# Altium PCB projet_pcb_nucleo_g431.PCBDOC
Units mil, origin at the board's own origin, x right, y up, seen from the top; angles counter-clockwise.
Board outline 7045 x 2760 mil, 2 copper layers (TopLayer, BottomLayer); 22 components, 35 nets, 107 pads, 0 vias.
Unrouted connection lines stored in the file: 45.
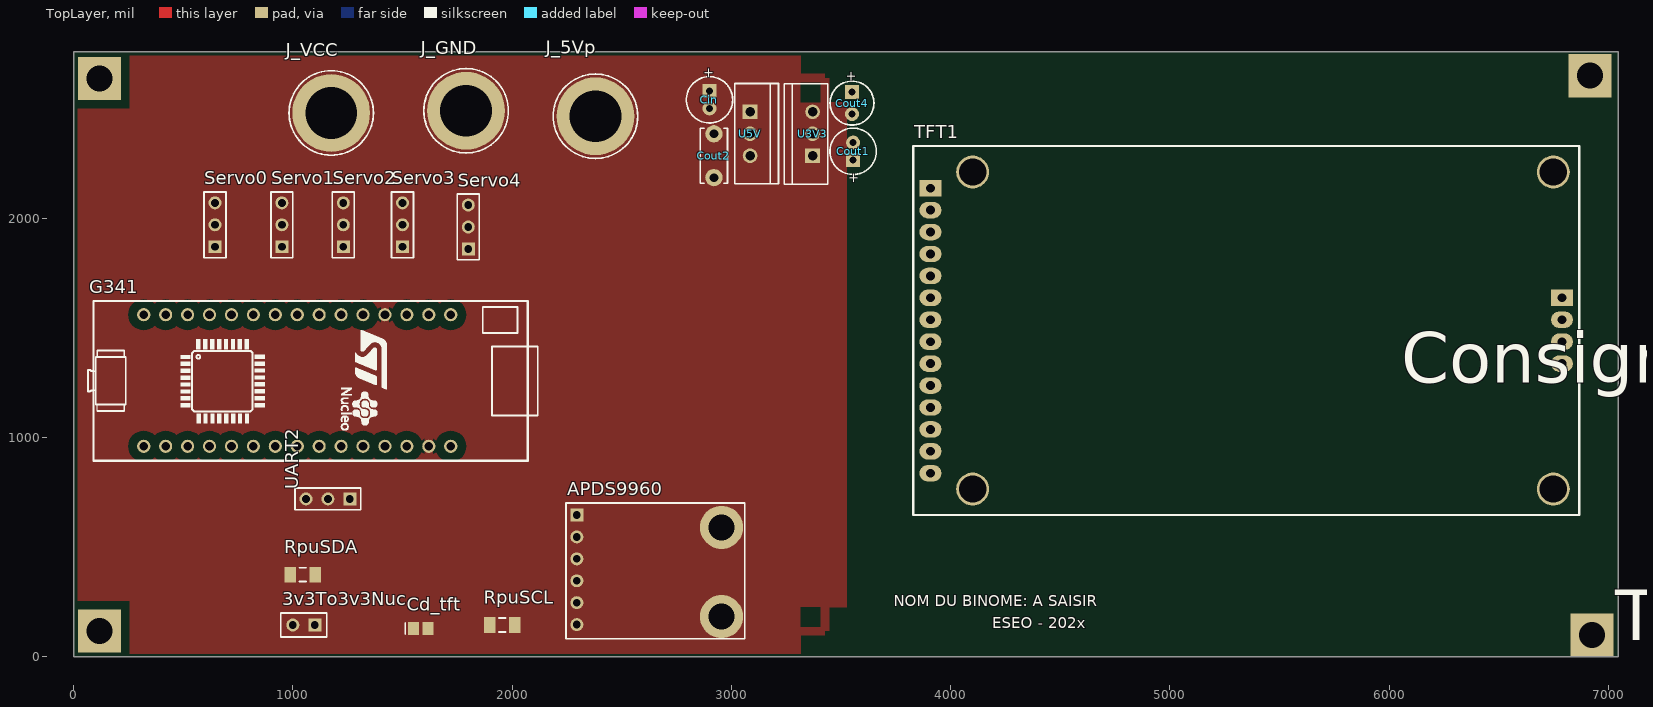
[diagram p0: TopLayer view]
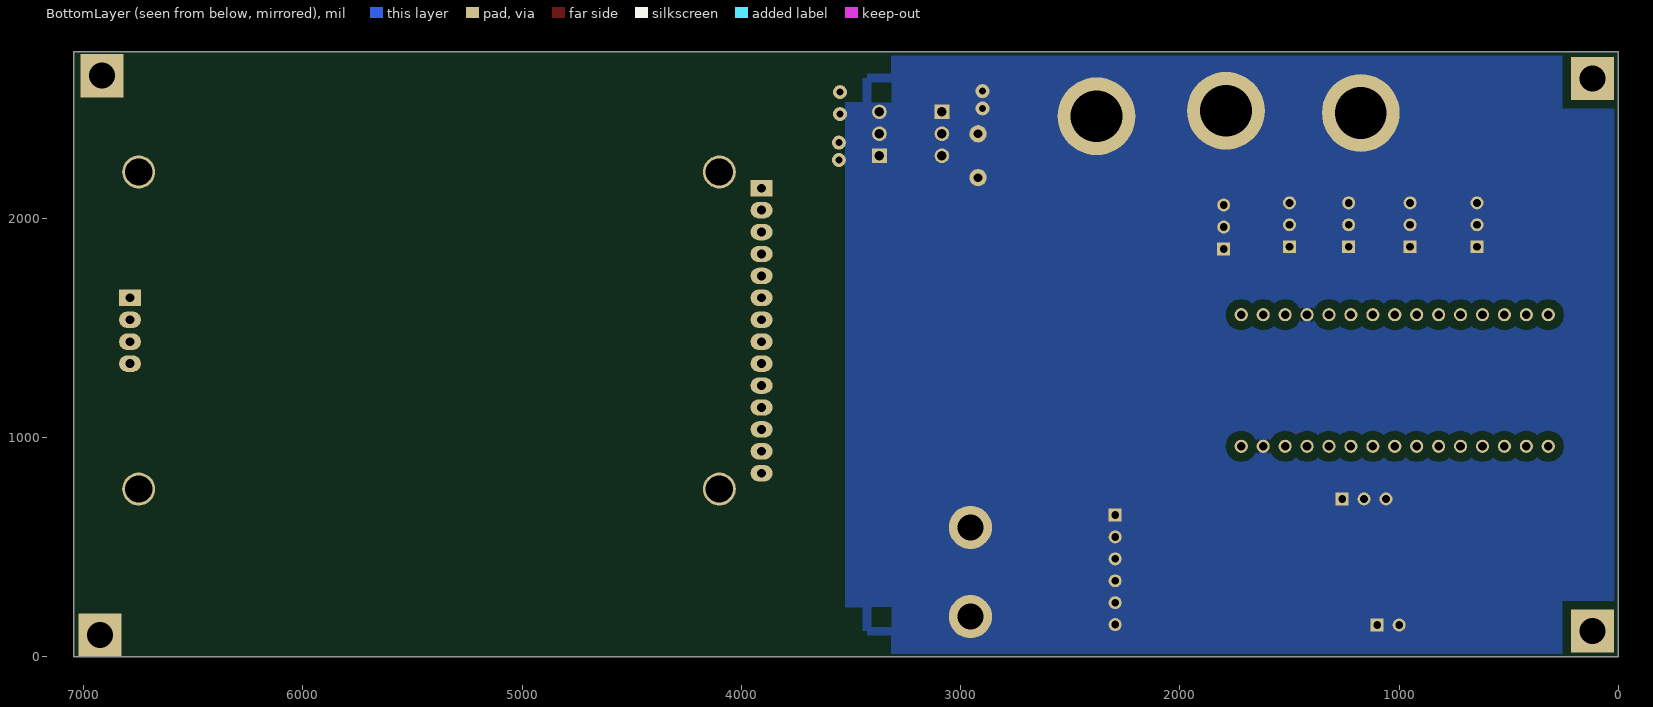
[diagram p1: BottomLayer view, seen from below]

## Layer stack, top to bottom
TopSolder: solder mask 0.4, Solder Resist, Dk 3.5
TopLayer: signal copper 1.4
Dielectric1: core 12.6, FR-4, Dk 4.8
BottomLayer: signal copper 1.4
BottomSolder: solder mask 0.4, Solder Resist, Dk 3.5

## Board outline
0,0 7045,0 7045,2760 0,2760

## Design rules (kind name [scope] priority, off if disabled: settings)
Clearance PowerPlaneClearance [InNamedPolygon('Bot-GND') Or  InNamedPolygon('Top-GND')] p1: gap=40 ignorepadtopadclearanceinfootprint=FALSE except(0: Arc-Hole Track-Hole SMDPad-Hole THPad-Hole Via-Hole Fill-Hole Poly-Hole Region-Hole Text-Hole)
Clearance [All] p2: gap=20 ignorepadtopadclearanceinfootprint=TRUE except(0: Arc-Hole Track-Hole SMDPad-Hole THPad-Hole Via-Hole Fill-Hole Poly-Hole Region-Hole Text-Hole)
FabricationTestPointUsage TestPointUsage [All] p1: valid=0 allowmultiple=FALSE
FabricationTestpoint Testpoint [All] p1: side=3 testpointundercomponent=TRUE minsize=40 maxsize=100 preferedsize=60 minholesize=20 maxholesize=40 preferedholesize=32 testpointgrid=1 allowsidetop=TRUE allowsidebottom=TRUE usegrid=TRUE gridtolerance=0.01
Height [All] p1: minheight=0 maxheight=2000 prefheight=500
HoleSize [All] p1: absolutevalues=TRUE maxlimit=300 minlimit=11.81 maxpercent=80.000 minpercent=20.000
PlaneClearance [All] p1: clearance=40
PlaneConnect [All] p1: planeconnectstyle=Relief reliefexpansion=19.68 reliefentries=4 reliefconductorwidth=40 reliefairgap=19.68
PolygonConnect [All] p1: connectstyle=Relief reliefconductorwidth=40 reliefentries=4 polygonreliefangle="90 Angle" airgapwidth=10
RoomDefinition projet_pcb_nucleo_g431 [InComponentClass('projet_pcb_nucleo_g431')] p1: confinementstyle=ConfineIn formatcopy=TRUE lockcomponents=FALSE outline 5090,95 6430,95 6430,570 5090,570
RoutingVias [All] p1: holewidth=23.62 width=60 viastyle="Through Hole" minholewidth=23.62 minwidth=60 maxholewidth=23.62 maxwidth=60
SilkToSolderMaskClearance SilkscreenOverComponentPads [IsPad] p1: minsilkscreentomaskgap=10 clearancetoexposedcopper=TRUE
SolderMaskExpansion [All] p1: expansion=2 istentingtop=FALSE
Width [All] p1: maxlimit=1000 minlimit=20 preferedwidth=40
23 further rules are at their usual default settings.

## Components (designator, comment, footprint, x,y, rotation, side; value= is the part's Value field where it differs from the comment)
3v3To3v3Nuc "JUMPER2" BARRETTE_2_M_D 1100,145 r180 top
APDS9960 "APDS9960" APDS9960 2295.16,646.69 r90 top
Cd_tft "10uF" C0805_N 1583.46,130 r0 top value=10µF
Cin "CONDENSATEUR_POL_ELECTROLY_RAD_2.0/5.08" CONDENSATEUR_POLARISE_ELECTROLYTIQUE_RADIAL_2.0/5.08 2900,2540 r270 top value=10µF/>25V
Cout1 "CONDENSATEUR_POL_ELECTROLY_RAD_2.0/5.08" CONDENSATEUR_POLARISE_ELECTROLYTIQUE_RADIAL_2.0/5.08 3555,2305 r90 top value=1µF/>10V
Cout2 "CONDENSATEUR_CER_RAD_5.08" CONDENSATEUR_CERAMIQUE_RADIAL_5.08 2920,2385 r270 top value=100nF
Cout4 "CONDENSATEUR_POL_ELECTROLY_RAD_2.54/5.08" CONDENSATEUR_POLARISE_ELECTROLYTIQUE_RADIAL_2.54/5.08 3550,2575 r270 top value=4.7µF/63V
G341 "STM32G431KB" NUCLEO-G431KB 1020,1260 r270 top
J_5Vp "DOUILLE BANANE 4mm" DOUILLE_BANANE_4mm#1 2380,2465 r0 top
J_GND "DOUILLE BANANE 4mm" DOUILLE_BANANE_4mm#2 1790,2490 r0 top
J_VCC "DOUILLE BANANE 4mm" DOUILLE_BANANE_4mm#2 1175,2480 r0 top
RpuSCL "RESISTANCE_CMS_1206" R1206_N 1955,145 r180 top value=4.7k
RpuSDA "RESISTANCE_CMS_1206" R1206_N 1045,375 r180 top value=4.7k
Servo0 "BARRETTE 3 CONTACTS 1 RANGEE MALE DROITE" BARRETTE_3_M_D 645,1870 r90 top
Servo1 "BARRETTE 3 CONTACTS 1 RANGEE MALE DROITE" BARRETTE_3_M_D 950,1870 r90 top
Servo2 "BARRETTE 3 CONTACTS 1 RANGEE MALE DROITE" BARRETTE_3_M_D 1230,1870 r90 top
Servo3 "BARRETTE 3 CONTACTS 1 RANGEE MALE DROITE" BARRETTE_3_M_D 1500,1870 r90 top
Servo4 "BARRETTE 3 CONTACTS 1 RANGEE MALE DROITE" BARRETTE_3_M_D 1800,1860 r90 top
TFT1 "ECRAN_TFT_2.4_TACTILE" ECRAN_TFT_2.4_TACTILE 3827.56,646.89 r0 top
U3V3 "REGULATEUR_TO220_78XX" REGULATEUR_TO220_78XX 3370,2385 r90 top
U5V "REGULATEUR_TO220_78XX" REGULATEUR_TO220_78XX 3085,2385 r270 top
UART2 "BARRETTE3" HDR1X3 1260,720 r180 top

## Footprints (in the part's own frame and the unit in brackets; to place one, negate y for a bottom-side part, rotate by r counter-clockwise, add the part's x,y. Pads: shape width x height; smd on the part's side, far side on the other; paste and mask are expansions set on the pad)
APDS9960 [mm]
  rect 1.5x1.5 hole 0.9: 1(0,0)
  round 1.5 hole 0.9: 2(-2.54,0) 3(-5.08,0) 4(-7.62,0) 5(-10.16,0) 6(-12.7,0)
  round 5 hole 3: FIX(-11.77,-16.76) FIX(-1.44,-16.76)
  silkscreen extent -14.35,-19.43 1.4,1.27, body extent -14.35,-19.23 1.4,1.21, height 14.04
BARRETTE_2_M_D [mm] "BARRETTE 2 CONTACTS ; 1 RANGEE ; DROITE ; MALE ; ESPACEMENT BROCHES = 2.54 mm"
  rect 1.5x1.5 hole 0.9: 1(0,0)
  round 1.5 hole 0.9: 2(2.54,0)
  silkscreen extent -1.4,-1.4 3.94,1.4, body extent -1.3,-1.2 3.78,1.3, height 8.55
BARRETTE_3_M_D [mm] "BARRETTE 3 CONTACTS ; 1 RANGEE ; DROITE ; MALE ; ESPACEMENT BROCHES = 2.54 mm"
  rect 1.5x1.5 hole 0.9: 1(0,0)
  round 1.5 hole 0.9: 2(2.54,0) 3(5.08,0)
  silkscreen extent -1.27,-1.27 6.35,1.27, body extent -1.21,-1.42 6.41,1.5, height 8.61
C0805_N [mm] "Chip Capacitor, Body 2.0x1.3mm, IPC Medium Density"
  rect 1.3x1.5 smd: 1(-0.85,0) 2(0.85,0)
  silkscreen extent -1.8,-0.65 -1.8,0.65, body extent -0.99,-0.63 1.01,0.63, height 0.8
CONDENSATEUR_CERAMIQUE_RADIAL_5.08 [mil] "CONDENSATEUR TRAVERSANT CERAMIQUE RADIAL ; DIMENSIONS : 3.17mm x 5.08mm"
  round 79 hole 40: 1(0,0) 2(200,0)
  silkscreen extent -25,-63 225,63, body extent -11,-43 209,42, height 148
CONDENSATEUR_POLARISE_ELECTROLYTIQUE_RADIAL_2.0/5.08 [mil] "CONDENSATEUR POLARISE ELECTROLYTIQUE RADIAL ; DIAMETRE : 5.08mm ; ESPACEMENT BROCHES : 2mm"
  rect 64x64 / inner round 64 / far side round 64 hole 32: 1(-39.37,0)
  round 64 hole 32: 2(39.37,0)
  silkscreen extent -106,-105 106,106, body extent -98,-98 98,98, height 433
CONDENSATEUR_POLARISE_ELECTROLYTIQUE_RADIAL_2.54/5.08 [mil] "CONDENSATEUR_POLARISE_ELECTROLYTIQUE_RADIAL ; DIAMETRE : 5.08mm ; ESPACEMENT BROCHES : 2.54mm"
  rect 64x64 / inner round 64 / far side round 64 hole 32: 1(0,0)
  round 64 hole 32: 2(100,0)
  silkscreen extent -50,-100 150,100, body extent -50,-101 149,98, height 446
DOUILLE_BANANE_4mm#1 [mm] "DOUILLE BANANE ; DIAMETRE PASSAGE CONTACT = 4 mm ; DIAMETRE PERCAGE = 6 mm"
  round 9 hole 6: 1(0,0)
  TopLayer pour cut-out: -5.55,2.35 -4.2,4.3 -2.3,5.6 0,6 2.3,5.6 4.2,4.3 5.55,2.35 6,0 5.55,-2.35 4.3,-4.25 2.35,-5.55 0,-6 -2.35,-5.55 -4.2,-4.3 -5.55,-2.35 -6,0
  BottomLayer pour cut-out: -5.55,2.35 -4.2,4.3 -2.3,5.6 0,6 2.3,5.6 4.2,4.3 5.55,2.35 6,0 5.55,-2.35 4.3,-4.25 2.35,-5.55 0,-6 -2.35,-5.55 -4.2,-4.3 -5.55,-2.35 -6,0
  silkscreen extent -4.89,-4.89 4.89,4.89, body extent -5.5,-5.6 5.63,5.53, height 4.79
DOUILLE_BANANE_4mm#2 [mm] "DOUILLE BANANE ; DIAMETRE PASSAGE CONTACT = 4 mm ; DIAMETRE PERCAGE = 6 mm"
  round 9 hole 6: 1(0,0)
  silkscreen extent -4.89,-4.89 4.89,4.89, body extent -5.5,-5.6 5.63,5.53, height 4.79
ECRAN_TFT_2.4_TACTILE [mil]
  round 150 hole 125: 0(272.44,118.11) 0(272.44,1563.78) 0(2920.47,118.11) 0(2920.47,1563.78)
  rect 100x75 hole 40: 1(80,1490) 18(2959.84,990)
  oval 100x75 hole 40: 2(80,1390) 3(80,1290) 4(80,1190) 5(80,1090) 6(80,990) 7(80,890) 8(80,790) 9(80,690) 10(80,590) 11(80,490) 12(80,390) 13(80,290) 14(80,190) 15(2959.84,690) 16(2959.84,790) 17(2959.84,890)
  silkscreen extent 0,-1 3039,1682, body extent 0,-2 3039,1680, height 337
HDR1X3 [mm] "Connector; Header; 3 Position"
  rect 1.5x1.5 hole 0.9: 1(0,0)
  round 1.5 hole 0.9: 2(2.54,0) 3(5.08,0)
  silkscreen extent -1.27,-1.27 6.35,1.27
NUCLEO-G431KB [mil] "STM32 Nucleo-32 development board with STM32G431KB MCU"
  round 60 hole 39.37: 1(-300,700) 2(-300,600) 3(-300,500) 4(-300,400) 5(-300,300) 6(-300,200) 7(-300,100) 8(-300,0) 9(-300,-100) 10(-300,-200) 11(-300,-300) 12(-300,-400) 13(-300,-500) 14(-300,-600) 15(-300,-700) 16(300,700) 17(300,600) 18(300,500) 19(300,400) 20(300,300) 21(300,200) 22(300,100) 23(300,0) 24(300,-100) 25(300,-200) 26(300,-300) 27(300,-400) 28(300,-500) 29(300,-600) 30(300,-700)
  silkscreen extent -362,-955 366,1096, body extent -362,-953 368,1096, height 842
R1206_N [mm] "Chip Resistor, Body 3.2x1.6mm, IPC Medium Density"
  rect 1.3x1.8 smd: 1(-1.45,0) 2(1.45,0)
  silkscreen extent -0.4,-0.8 0.4,0.8, body extent -1.68,-0.87 1.68,0.87, height 0.71
REGULATEUR_TO220_78XX [mm] "BOITIER TO220 ; DIMENSIONS : 11.2mm x 4.7mm ; ESPACEMENT BROCHES : 2.54 mm"
  rect 1.7x1.7 hole 1.1: 1(-2.54,0)
  round 1.7 hole 1.1: 2(0,0) 3(2.54,0)
  silkscreen extent -5.83,-1.77 5.8,3.29, body extent -5.61,-1.59 5.61,3.1, height 19.33

## Part data
3v3To3v3Nuc: "BARRETTE 2 CONTACTS 1 RANGEE MALE DROITE", Type=JUMPER2
Cd_tft: library part CONDENSATEUR_CMS_CER_0805, "CONDENSATEUR CMS CERAMIQUE 0805", Type=Cd_tft
Cin Cout1: "CONDENSATEUR POLARISE ELECTROLYTIQUE RADIAL 2.0/5.08", Type=POL_RAD_2.0/5.08
Cout2: "CONDENSATEUR TRAVERSANT CERAMIQUE RADIAL 5.08mm", Type=RADIAL_5.08
Cout4: "CONDENSATEUR POLARISE ELECTROLYTIQUE RADIAL 2.54/5.08", Type=POL_RAD_2.54/5.08
G341: library part G431_Nucleo, "The STM32 Nucleo-32 board provides an affordable and flexible way for users to try out new concepts and build prototypes by choosing from the various combinations of performance and power consumption features, provided by the STM32 microcontroller."
J_5Vp J_GND J_VCC: library part DOUILLE_BANANE_4mm, "DOUILLE BANANE 4 mm", Type=BANANE_4mm
RpuSCL RpuSDA: "RESISTANCE CMS 1206", Type=CMS_1206
Servo0 Servo1 Servo2 Servo3 Servo4: library part "BARRETTE_3 CONTACTS_1 RANGEE_MALE_DROITE", Type=M_D_3
U3V3 U5V: "REGULATEUR DE TENSION POSITIVE 78XX BOITIER TO220", Package=(TO220)
  U3V3: Type=LF33CV
  U5V: Type=7805
UART2: "Header, 3-Pin", LatestRevisionDate=17-Jul-2002, LatestRevisionNote="Re-released for DXP Platform.", Publisher="Altium Limited"

## Free pads (board coordinates)
  rect 196.85x196.85 hole 118.11: 1(118.11,2637.8) 2(118.11,118.11) 3(6925,100) 4(6915,2650)

## Nets (pads, with @x,y where several pads share a name; then routed paths per layer and width w, separated by ;. In a path a pad name is that pad's centre, name@x,y a point inside that pad or via, vN(x,y) a via of type N, cw(c..) or ccw(c..) an arc to the next point about the centre after c; other vN are vias at no path point)
+3V3_NUC: 3v3To3v3Nuc.2 G341.29 RpuSCL.2 RpuSDA.2
+5V: Cout1.1 Cout2.2 U3V3.1 U5V.3
+5V_NUC: G341.19
+5V_Puissance: J_5Vp.1 Servo0.2 Servo1.2 Servo2.2 Servo3.2 Servo4.2
GND: APDS9960.2 Cd_tft.1 Cin.2 Cout1.2 Cout2.1 Cout4.2 G341.4 G341.17 J_GND.1 pad.3 pad.4 Servo0.1 Servo1.1 Servo2.1 Servo3.1 Servo4.1 TFT1.2 U3V3.2 U5V.2 UART2.1
NRST: G341.3 G341.18
PA0: G341.27 Servo0.3
PA1: G341.26 Servo1.3
PA2_UART2_TX: G341.20 UART2.2
PA3_UART2_RX: G341.25 UART2.3
PA4: G341.24 TFT1.3
PA5(PB7): G341.23 TFT1.7 TFT1.10
PA6(PA15): G341.22 TFT1.9 TFT1.13
PA7: G341.21 TFT1.6 TFT1.12
PA8: G341.12 TFT1.5
PA9: G341.1
PA10: G341.2 Servo2.3
PA11: G341.13 TFT1.11
PA12: G341.5
PA15_I2C_SCL: APDS9960.5 G341.8 RpuSCL.1
PB0: G341.6 Servo3.3
PB3/(PB8): G341.30 TFT1.4
PB4: G341.15 Servo4.3
PB5: G341.14 TFT1.14
PB6: G341.9
PB7_I2C_SDA: APDS9960.4 G341.7 RpuSDA.1
PF0: G341.10
PF1: G341.11
SD_CS: TFT1.18
SD_MISO: TFT1.16
SD_MOSI: TFT1.17
SD_SCK: TFT1.15
TFT-LED: 3v3To3v3Nuc.1 APDS9960.3 Cd_tft.2 Cout4.1 TFT1.1 TFT1.8 U3V3.3
VCC: Cin.1 J_VCC.1 U5V.1
VIN: G341.16
pads on no net: APDS9960.1 APDS9960.6 APDS9960.FIX G341.28 TFT1.0

## Polygon pours and split planes (outlines as drawn)
GND on TopLayer "Top-GND" (solid, pour order 4): 20,2740 7045,2740 7045,15 20,15
GND on BottomLayer "Bot-GND" (solid, pour order 5): 20,2740 7045,2740 7045,15 20,15

## Other copper
TopLayer:

## Silkscreen, mask and mechanical layers (free items; w line width, h text height)
TopOverlay:
  text "Consignes / Conseils :" at 6055,1175 h393.7
  text "1- désactivez la fonctionnalité \"online DRC\"" at 6540,810 h393.7
  text "Tools->Preferences -> décocher 'online DRC'" at 7015,425 h393.7
  text "NOM DU BINOME: A SAISIR" at 3740,230 h50
  text "ESEO - 202x" at 4190,130 h50
  text "Tools->Reset error markers" at 7030,0 h393.7
  text "2- Déplacez les plans de masse en dehors de la carte" at 6535,-425 h393.7
  text "3- Si elles sont visibles / gênantes : masquez les couches mécaniques 3D" at 6510,-950 h393.7
  text "Bouton-droit sur les onglets (en bas) Mechanical1, 13 -> Hide" at 7060,-1395 h393.7
  text "4- mettre vos noms à la place de \"nom du binôme\"" at 6505,-1940 h393.7
  text "5- placement" at 6525,-2510 h393.7
  text "6- meilleur placement" at 6525,-3040 h393.7
  text "7- encore meilleur placement" at 6515,-3565 h393.7
  text "8- routage" at 6510,-4105 h393.7
  text "9- Remettez les plans de masse + Tools -> Polygon Pours -> Repour all" at 6515,-4670 h393.7
Mechanical1:
  the board outline again, w20

## Text inside footprints (layer, text, board x,y; h text height)
Cin: TopOverlay "+" at 2878.35,2688.82 h45 r270
Cout1: TopOverlay "+" at 3576.65,2156.18 h45 r90
Cout4: TopOverlay "+" at 3528.35,2671.85 h45 r270